# EAGLE board inktime_pcb (EAGLE 9.7.0)
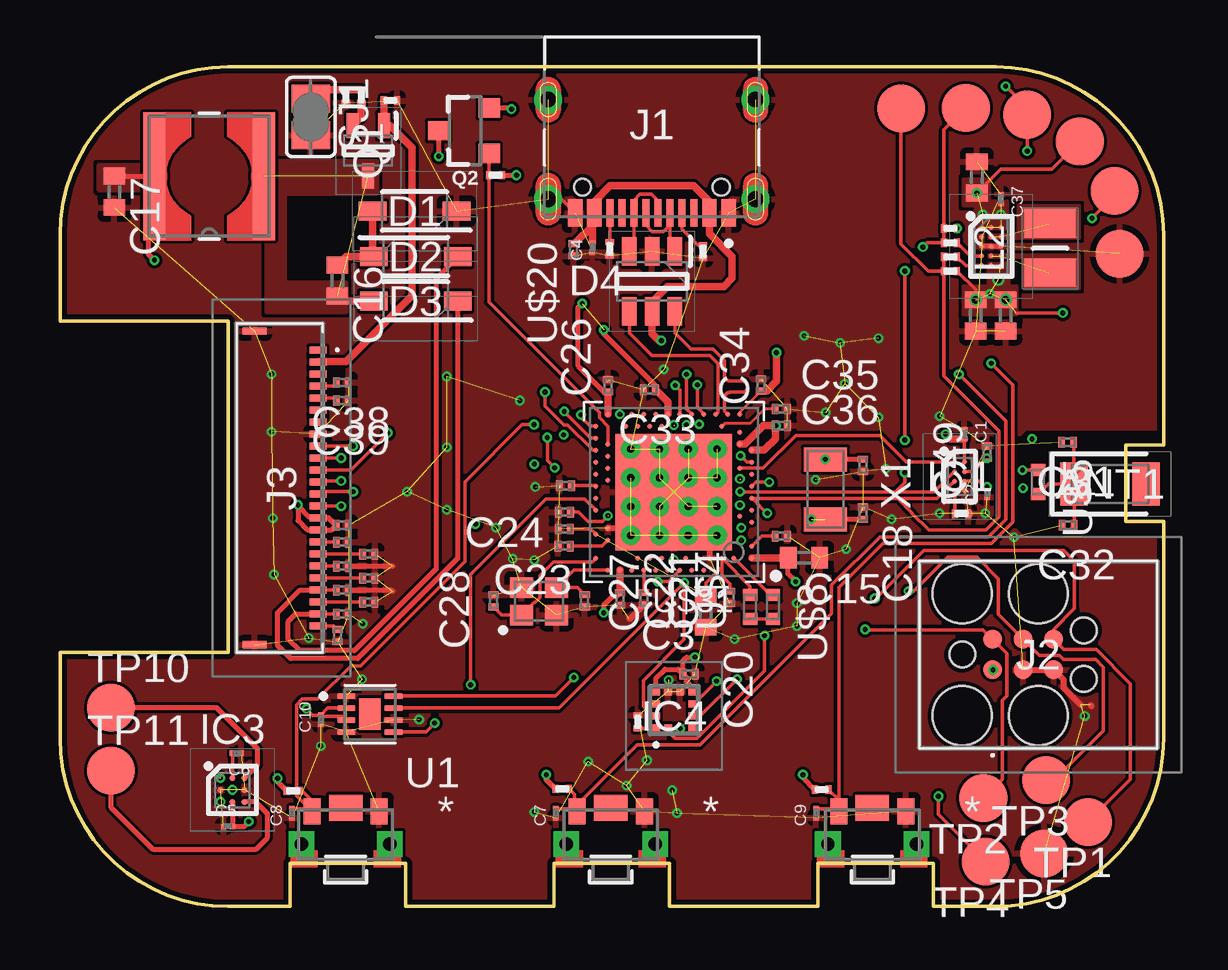
[diagram p0: board, top side]
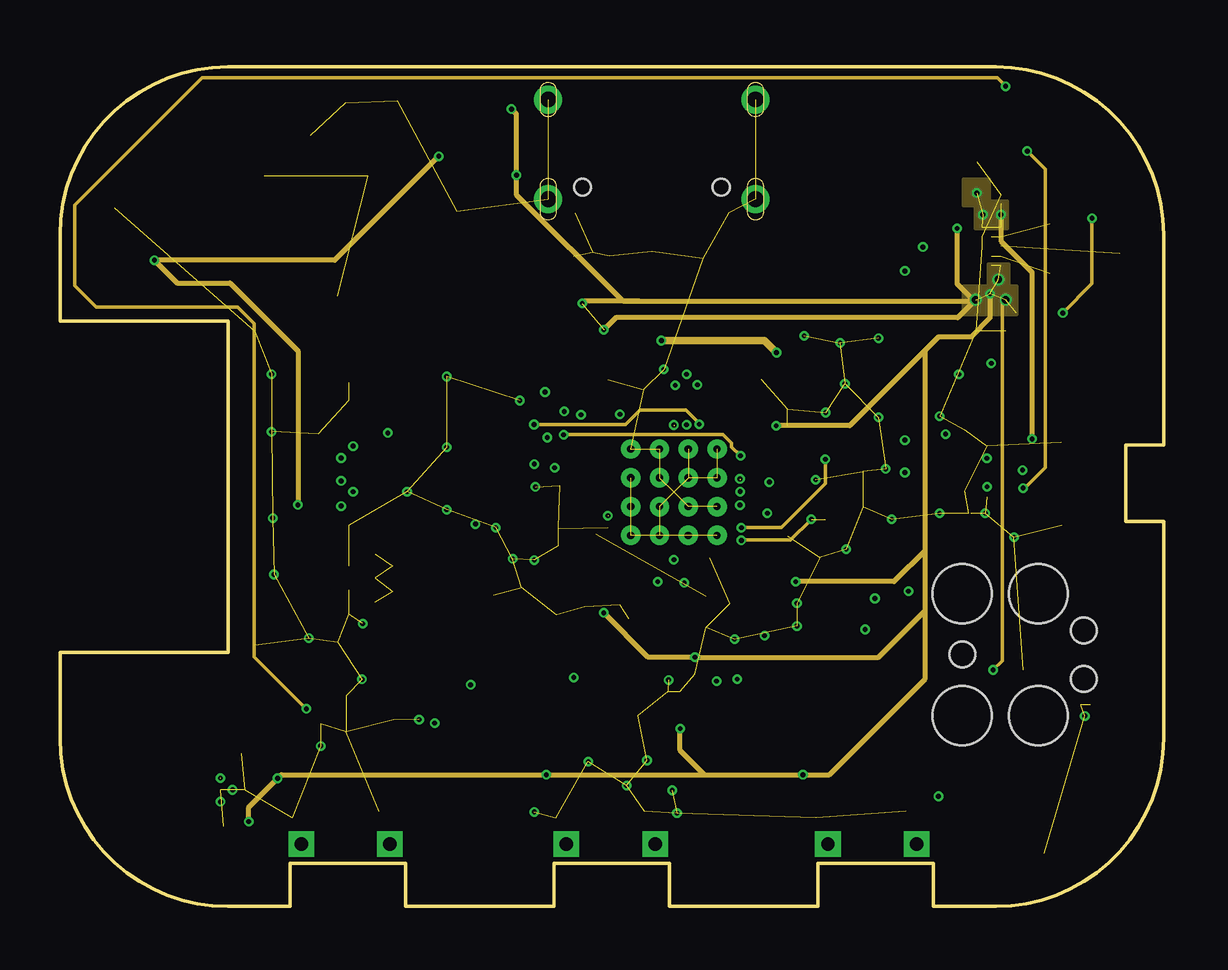
[diagram p1: board, inner layer Route2]
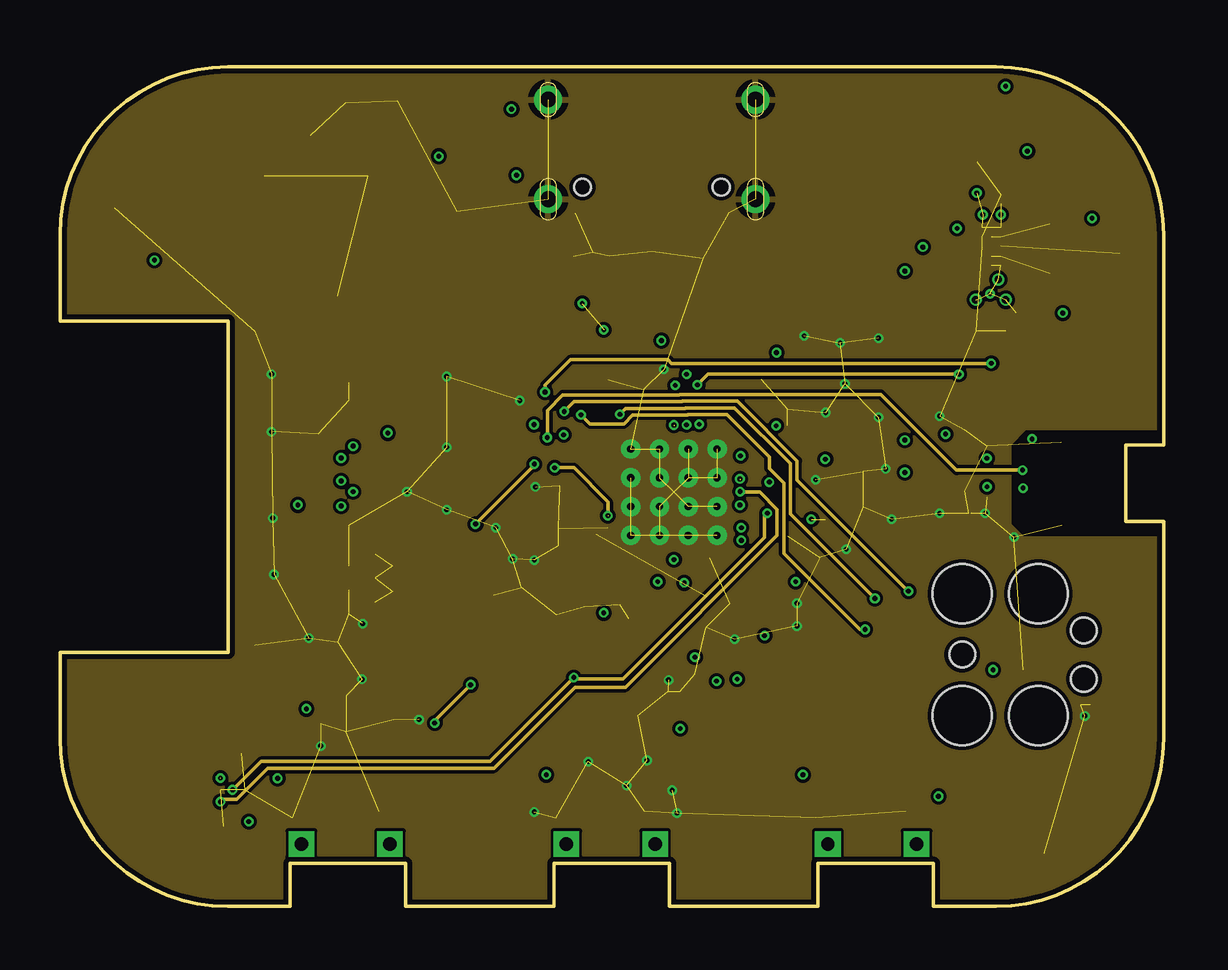
[diagram p2: board, inner layer Route15]
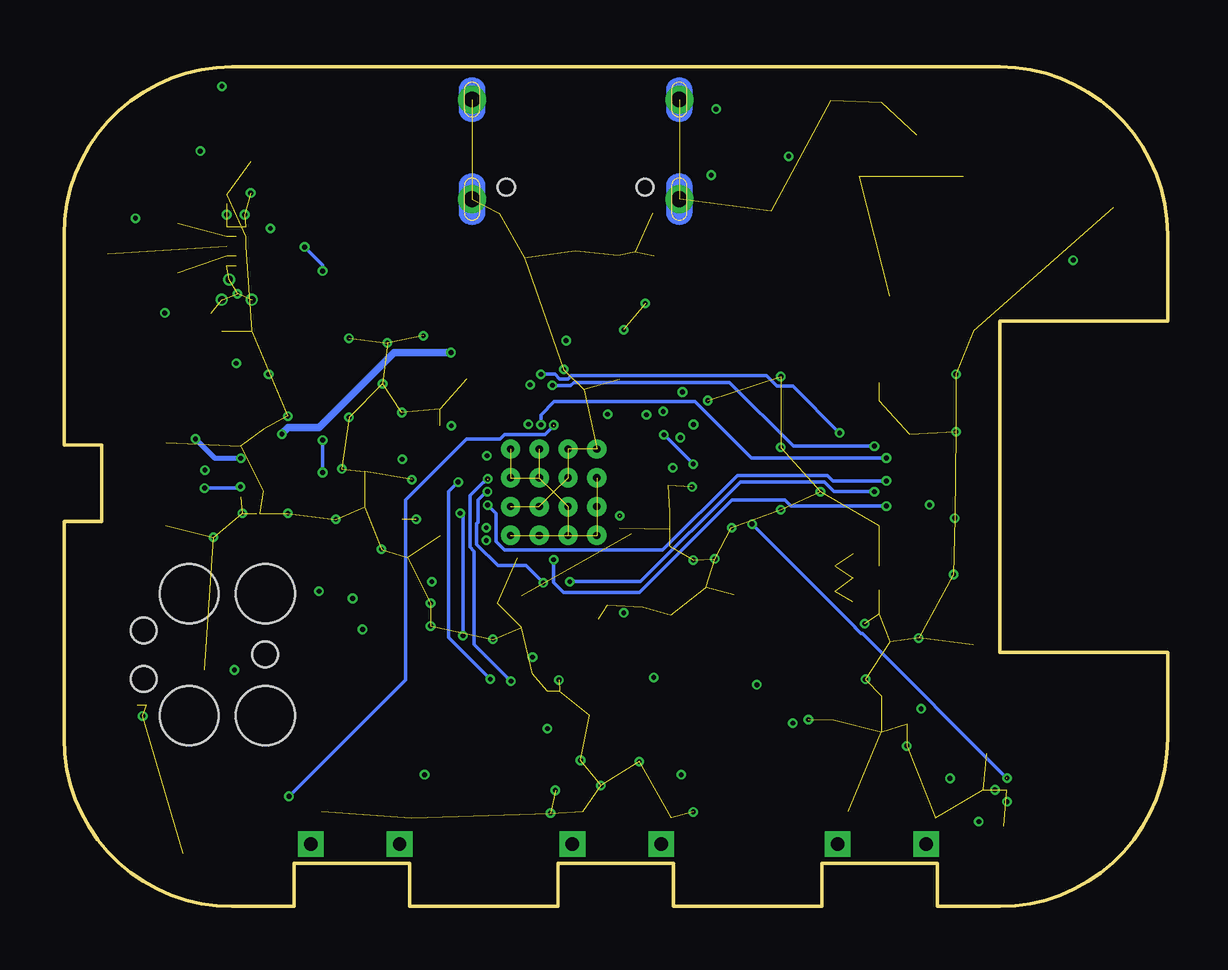
[diagram p3: board, bottom side, seen from below]

Size 46 x 35 mm. Coordinates in mm from the lower left corner, seen from the top.
Outline: 39,0 36.4,0 36.4,1.8 31.6,1.8 31.6,0 25.4,0 25.4,1.8 20.6,1.8 20.6,0 14.4,0 14.4,1.8 9.6,1.8 9.6,0 7,0 arc-90 0,7 0,10.6 7,10.6 7,24.4 0,24.4 0,28 arc-90 7,35 39,35 arc-90 46,28 46,19.24 44.42,19.24 44.42,16.04 46,16.04 46,7 arc-90 39,0
Copper layers (1+2*15+16): Top 0.035mm / dielectric 1.6mm / Route2 0.035mm / dielectric 0.15mm / Route15 0.035mm / dielectric 0.2mm / Bottom 0.035mm
Design rules "jlcpcb-2layers.dru *": minimum track width 5mil, minimum drill 0.2mm, track to track 5mil, track to pad 5mil, pad to pad 5mil, via to via 5mil, smd to smd 5mil, copper to edge 0.2mm, drill to drill 6mil, minimum pad ring 10mil, minimum via ring 0.1mm, stop-mask expansion 4mil, vias tented up to drill 0mil, thermal gap 10mil

## Footprints (pad centres in the part's own frame; a part is rotated, then mirrored left to right if it is on the bottom)
2450AT18B100E_ANTC3216X140N = smd 1.15 x 1.8: 1 -1.5,0; 2 1.5,0
GRM011R60J152KE01L_2_CAPC0201X13N = smd 0.22 x 0.23: 1 -0.185,0; 2 0.185,0
NORDIC_NRF_3_RESC0201_L = smd 0.28 x 0.43: 1 -0.255,0; 2 0.255,0
ESP32_C6_LIBRARY_1_ESP32_WROVER_EAGLE-LTSPICE_C0402 = smd 0.7 x 0.9: 1 -0.65,0; 2 0.65,0
ESP32_C6_LIBRARY_5_SOD3716X135N = smd 1.15 x 0.8: 1 -1.75,0; 2 1.75,0
ESP32_C6_LIBRARY_3_SOT95P280X145-6N = smd 1.2 x 0.6: 1 -1.25,0.95; 2 -1.25,0; 3 -1.25,-0.95; 4 1.25,-0.95; 5 1.25,0; 6 1.25,0.95
BQ25180YBGR_BGA8C40P2X4_100X155X50 = smd 0.2 x 0.2: A1 -0.2,0.6; A2 0.2,0.6; B1 -0.2,0.2; B2 0.2,0.2; C1 -0.2,-0.2; C2 0.2,-0.2; D1 -0.2,-0.6; D2 0.2,-0.6
RT6160AWSC_BGA15C40P3X5_140X230X60 = smd 0.216 x 0.216: A1 -0.4,0.8; A2 0,0.8; A3 0.4,0.8; B1 -0.4,0.4; B2 0,0.4; B3 0.4,0.4; C1 -0.4,0; C2 0,0; C3 0.4,0; D1 -0.4,-0.4; D2 0,-0.4; D3 0.4,-0.4; E1 -0.4,-0.8; E2 0,-0.8; E3 0.4,-0.8
DRV2605YZFR_BGA9C50P3X3_144X144X62 = smd 0.25 x 0.25: A1 -0.5,0.5; A2 0,0.5; A3 0.5,0.5; B1 -0.5,0; B2 0,0; B3 0.5,0; C1 -0.5,-0.5; C2 0,-0.5; C3 0.5,-0.5
BMA423_BMA423 = smd 0.3 x 0.35: 1 -0.75,-0.775; 2 -0.25,-0.775; 3 0.25,-0.775; 4 0.75,-0.775; 7 0.75,0.775; 8 0.25,0.775; 9 -0.25,0.775; 10 -0.75,0.775 | smd 0.35 x 0.3: 5 0.775,-0.25; 6 0.775,0.25; 11 -0.775,0.25; 12 -0.775,-0.25
KH-TYPE-C-16P_KINGHELM_KH-TYPE-C-16P = smd 0.6 x 1.15: A1_B12 -3.2,4.725; A4_B9 -2.4,4.725; A9_B4 2.4,4.725; A12_B1 3.2,4.725 | smd 0.3 x 1.15: A5 -1.25,4.725; A6 -0.25,4.725; A7 0.25,4.725; A8 1.25,4.725; B5 1.75,4.725; B6 0.75,4.725; B7 -0.75,4.725; B8 -1.75,4.725 | drill 0.65 pad 1.05: SH1 -4.32,0; SH2 4.32,0; SH3 -4.32,4.15; SH4 4.32,4.15 | hole 0.7: -2.89,3.65; 2.89,3.65
TC2030-IDC_TC2030IDC = smd 0.783 x 0.783: 1 -0.953,-0.635; 2 -0.953,0.635; 3 0.317,-0.635; 4 0.317,0.635; 5 1.588,-0.635; 6 1.588,0.635 | hole 2.451: -2.223,-2.54; -2.223,2.54; 0.952,-2.54; 0.952,2.54 | hole 1.067: -2.223,0; 2.857,-1.016; 2.857,1.016
503480-2400_5034802400 = smd 0.3 x 0.7: 1 -5.75,1.525; 2 -5.25,1.525; 3 -4.75,1.525; 4 -4.25,1.525; 5 -3.75,1.525; 6 -3.25,1.525; 7 -2.75,1.525; 8 -2.25,1.525; 9 -1.75,1.525; 10 -1.25,1.525; 11 -0.75,1.525; 12 -0.25,1.525; 13 0.25,1.525; 14 0.75,1.525; 15 1.25,1.525; 16 1.75,1.525; 17 2.25,1.525; 18 2.75,1.525; 19 3.25,1.525; 20 3.75,1.525; 21 4.25,1.525; 22 4.75,1.525; 23 5.25,1.525; 24 5.75,1.525 | smd 0.3 x 1: MP1 -6.54,-1.125; MP2 6.54,-1.125
MLP2016SR47MT0S1_INDC2016X100N = smd 1.2 x 2.2: 1 -1.028,0; 2 1.028,0
ESP32_C6_LIBRARY_2_IND_4828-WE-TPC_WRE = smd 0.9 x 5.3: 1 -2.286,0; 2 2.286,0
ESP32_C6_LIBRARY_6_SOT65P210X110-3N = smd 1.05 x 0.5: 1 -1.05,0.65; 2 -1.05,-0.65; 3 1.05,0
ESP32_C6_LIBRARY_4_ESP32_C6_LIBRARY_4_ESP32_C6_LIBRARY_4_ESP32_C6_LIBRARY_4_ESP32_WROVER_SPARKFUN-DISCRETESEMI_SOT23-3 = smd 0.8 x 0.9: 1 -0.95,-1; 2 0.95,-1; 3 0,1.1
ERA-1AEB3401C_0201 = smd 0.35 x 0.25: 1 0,0.275; 2 0,-0.275
ESP32_C6_LIBRARY_7_JUMPER_SJ = smd 1.168 x 1.6: 1 -0.762,0; 2 0.762,0
2025-10-22_07-23-44_LIBRARY_SW_EVP-AKE31A_PAN = smd 0.711 x 1.092: 1 -1.4,-0.972; 2 1.4,-0.972 | drill 0.559 pad 0.914 square: 3 -1.848,0.381; 4 1.848,0.381 | smd 1.397 x 1.092: 5 0,-1.124
HECTOR_WATCH_1_TP20R = smd 2 x 2: TP 0,0
ESP32_C6_LIBRARY_SON50P200X200X80-9N = smd 0.76 x 0.27: 1 -0.985,0.75; 2 -0.985,0.25; 3 -0.985,-0.25; 4 -0.985,-0.75; 5 0.985,-0.75; 6 0.985,-0.25; 7 0.985,0.25; 8 0.985,0.75 | smd 0.9 x 1.3: 9 0,0
NORDIC_NRF_2_RESC0402_L = smd 0.5 x 0.6: 1 -0.5,0; 2 0.5,0
NORDIC_NRF_BT-XTAL_2016_N = smd 0.95 x 0.85: 1 -0.725,-0.575; 2 0.725,-0.575; 3 0.725,0.575; 4 -0.725,0.575
NORDIC_NRF_4_AQFN50P700X700X85_HS-74N = smd 4.85 x 4.85: P$74 0,0 | drill 0.3 pad 0.6: P$75 -1.8,1.8; P$76 -0.6,1.8; P$77 0.6,1.8; P$78 1.8,1.8; P$79 -1.8,0.6; P$80 -0.6,0.6; P$81 0.6,0.6; P$82 1.8,0.6; P$83 -1.8,-0.6; P$84 -0.6,-0.6; P$85 0.6,-0.6; P$86 1.8,-0.6; P$87 -1.8,-1.8; P$88 -0.6,-1.8; P$89 0.6,-1.8; P$90 1.8,-1.8 | smd 0.2 x 0.2: P$A8 -1.25,3.25; P$A10 -0.75,3.25; P$A12 -0.25,3.25; P$A14 0.25,3.25; P$A16 0.75,3.25; P$A18 1.25,3.25; P$A20 1.75,3.25; P$A22 2.25,3.25; P$A23 2.75,3.25; P$AA24 3.25,-2.25; P$AB2 -2.75,-2.5; P$AC5 -2,-2.75; P$AC9 -1,-2.75; P$AC11 -0.5,-2.75; P$AC13 0,-2.75; P$AC15 0.5,-2.75; P$AC17 1,-2.75; P$AC19 1.5,-2.75; P$AC21 2,-2.75; P$AC24 3.25,-2.75; P$AD2 -2.75,-3.25; P$AD4 -2.25,-3.25; P$AD6 -1.75,-3.25; P$AD8 -1.25,-3.25; P$AD10 -0.75,-3.25; P$AD12 -0.25,-3.25; P$AD14 0.25,-3.25; P$AD16 0.75,-3.25; P$AD18 1.25,-3.25; P$AD20 1.75,-3.25; P$AD22 2.25,-3.25; P$AD23 2.75,-3.25; P$B1 -3.25,2.75; P$B3 -2.5,2.75; P$B5 -2,2.75; P$B7 -1.5,2.75; P$B9 -1,2.75; P$B11 -0.5,2.75; P$B13 0,2.75; P$B15 0.5,2.75; P$B17 1,2.75; P$B19 1.5,2.75; P$B24 3.25,2.75; P$C1 -3.25,2.25; P$D2 -2.75,2; P$D23 2.75,2; P$E24 3.25,1.75; P$F2 -2.75,1.5; P$F23 2.75,1.5; P$G1 -3.25,1.25; P$H2 -2.75,1; P$H23 2.75,1; P$J1 -3.25,0.75; P$J24 3.25,0.75; P$K2 -2.75,0.5; P$L1 -3.25,0.25; P$L24 3.25,0.25; P$M2 -2.75,0; P$N1 -3.25,-0.25; P$N24 3.25,-0.25; P$P2 -2.75,-0.5; P$P23 2.75,-0.5; P$R1 -3.25,-0.75; P$R24 3.25,-0.75; P$T2 -2.75,-1; P$T23 2.75,-1; P$U1 -3.25,-1.25; P$U24 3.25,-1.25; P$V23 2.75,-1.5; P$W1 -3.25,-1.75; P$W24 3.25,-1.75; P$Y2 -2.75,-2; P$Y23 2.75,-2
NORDIC_NRF_1_XTAL_3215_N = smd 1 x 1.8: 1 -1.25,0; 2 1.25,0

## Placement (x,y rotation side)
ANT1  2450AT18B100E_2450AT18B100E  [2450AT18B100E_ANTC3216X140N]  43.77,17.61 0 top
C1  1u  [GRM011R60J152KE01L_2_CAPC0201X13N]  37.7,19.7 270 top
C2  1u  [GRM011R60J152KE01L_2_CAPC0201X13N]  38.65,17.24 90 top
C3  100n  [NORDIC_NRF_3_RESC0201_L]  26.22,9.69 0 top
C4  0.1u  [GRM011R60J152KE01L_2_CAPC0201X13N]  22.2,27.45 90 top
C5  0.1u  [GRM011R60J152KE01L_2_CAPC0201X13N]  7.01,3.34 0 top
C6  1u  [GRM011R60J152KE01L_2_CAPC0201X13N]  7.37,6.39 180 top
C7  0.1u  [GRM011R60J152KE01L_2_CAPC0201X13N]  20.67,3.89 90 top
C8  0.1u  [GRM011R60J152KE01L_2_CAPC0201X13N]  9.67,3.89 90 top
C9  0.1u  [GRM011R60J152KE01L_2_CAPC0201X13N]  31.52,3.89 90 top
C10  1u  [GRM011R60J152KE01L_2_CAPC0201X13N]  10.87,7.79 90 top
C11  10u  [ESP32_C6_LIBRARY_1_ESP32_WROVER_EAGLE-LTSPICE_C0402]  38.22,30.39 90 top
C12  22u  [ESP32_C6_LIBRARY_1_ESP32_WROVER_EAGLE-LTSPICE_C0402]  38.17,24.63 270 top
C13  22u  [ESP32_C6_LIBRARY_1_ESP32_WROVER_EAGLE-LTSPICE_C0402]  39.42,24.63 270 top
C14  1.0u  [ESP32_C6_LIBRARY_1_ESP32_WROVER_EAGLE-LTSPICE_C0402]  26.92,12.29 270 top
C15  4.7u  [ESP32_C6_LIBRARY_1_ESP32_WROVER_EAGLE-LTSPICE_C0402]  31.02,14.54 0 top
C16  4.7u/25V  [ESP32_C6_LIBRARY_1_ESP32_WROVER_EAGLE-LTSPICE_C0402]  11.57,26.09 270 top
C17  10u  [ESP32_C6_LIBRARY_1_ESP32_WROVER_EAGLE-LTSPICE_C0402]  2.27,29.79 270 top
C18  4.7u  [NORDIC_NRF_3_RESC0201_L]  33.47,16.4 270 top
C19  4.7u  [NORDIC_NRF_3_RESC0201_L]  33.47,18.39 90 top
C20  47n  [NORDIC_NRF_3_RESC0201_L]  27.92,12.89 270 top
C21  N.C  [NORDIC_NRF_3_RESC0201_L]  24.35,12.83 270 top
C22  100n  [NORDIC_NRF_3_RESC0201_L]  23.34,12.82 270 top
C23  100p  [NORDIC_NRF_3_RESC0201_L]  21.02,15.02 180 top
C24  N.C  [NORDIC_NRF_3_RESC0201_L]  21.02,15.74 180 top
C25  820p  [NORDIC_NRF_3_RESC0201_L]  21.07,17.54 180 top
C26  100n  [NORDIC_NRF_3_RESC0201_L]  22.84,21.71 90 top
C27  12p  [NORDIC_NRF_3_RESC0201_L]  21.87,12.74 270 top
C28  12p  [NORDIC_NRF_3_RESC0201_L]  18.07,12.74 90 top
C29  N.C  [NORDIC_NRF_3_RESC0201_L]  21.03,16.44 180 top
C30  100n  [NORDIC_NRF_3_RESC0201_L]  30.07,15.44 0 top
C31  N.C  [NORDIC_NRF_3_RESC0201_L]  42,19.35 180 top
C32  N.C  [NORDIC_NRF_3_RESC0201_L]  42.02,15.89 180 top
C33  100n  [NORDIC_NRF_3_RESC0201_L]  24.57,21.54 180 top
C34  4.7u  [NORDIC_NRF_3_RESC0201_L]  29.22,21.74 90 top
C35  4.7u  [NORDIC_NRF_3_RESC0201_L]  30.07,20.74 0 top
C36  4.7u  [NORDIC_NRF_3_RESC0201_L]  30.07,20.04 0 top
C37  0.1u  [GRM011R60J152KE01L_2_CAPC0201X13N]  39.22,29.49 270 top
C38  1u/50V  [NORDIC_NRF_3_RESC0201_L]  11.77,21.84 180 top
C39  1u/50V  [NORDIC_NRF_3_RESC0201_L]  11.77,21.09 180 top
C40  1u/50V  [NORDIC_NRF_3_RESC0201_L]  11.77,15.19 180 top
C41  1u/50V  [NORDIC_NRF_3_RESC0201_L]  12.87,14.69 180 top
C42  1u/50V  [NORDIC_NRF_3_RESC0201_L]  11.77,14.19 180 top
C43  1u/50V  [NORDIC_NRF_3_RESC0201_L]  12.87,13.69 180 top
C44  1u/50V  [NORDIC_NRF_3_RESC0201_L]  11.77,13.19 180 top
C45  1u/50V  [NORDIC_NRF_3_RESC0201_L]  12.87,12.69 180 top
C46  1u/50V  [NORDIC_NRF_3_RESC0201_L]  11.77,12.19 180 top
C47  1u/50V  [NORDIC_NRF_3_RESC0201_L]  11.57,11.29 90 top
C48  0.1u/50V  [NORDIC_NRF_3_RESC0201_L]  11.77,15.89 180 top
C49  47n  [NORDIC_NRF_3_RESC0201_L]  38.64,18.94 90 top
D1  ESP32_C6_LIBRARY_5_MBR0530  [ESP32_C6_LIBRARY_5_SOD3716X135N]  14.78,28.99 180 top
D2  ESP32_C6_LIBRARY_5_MBR0530  [ESP32_C6_LIBRARY_5_SOD3716X135N]  14.83,27.09 0 top
D3  ESP32_C6_LIBRARY_5_MBR0530  [ESP32_C6_LIBRARY_5_SOD3716X135N]  14.83,25.24 180 top
D4  ESP32_C6_LIBRARY_3_USBLC6-2SC6Y  [ESP32_C6_LIBRARY_3_SOT95P280X145-6N]  24.68,26.06 270 top
IC1  BQ25180YBGR_BQ25180YBGR  [BQ25180YBGR_BGA8C40P2X4_100X155X50]  37.5,17.93 0 top
IC2  RT6160AWSC_RT6160AWSC  [RT6160AWSC_BGA15C40P3X5_140X230X60]  38.82,27.52 0 top
IC3  DRV2605YZFR_DRV2605YZFR  [DRV2605YZFR_BGA9C50P3X3_144X144X62]  7.19,4.86 0 top
IC4  BMA423_BMA423  [BMA423_BMA423]  25.6,8.19 0 top
J1  KH-TYPE-C-16P_KH-TYPE-C-16P  [KH-TYPE-C-16P_KINGHELM_KH-TYPE-C-16P]  24.67,33.64 180 top
J2  TC2030-IDC_TC2030-IDC  [TC2030-IDC_TC2030IDC]  39.83,10.5 0 top
J3  503480-2400_503480-2400  [503480-2400_5034802400]  9.23,17.45 270 top
L2  MLP2016SR47MT0S1_FTC252012SR47MBCA  [MLP2016SR47MT0S1_INDC2016X100N]  41.27,27.44 270 top
L4  68u  [ESP32_C6_LIBRARY_2_IND_4828-WE-TPC_WRE]  6.22,30.44 180 top
Q1  ESP32_C6_LIBRARY_6_SI1308EDL-T1-GE3  [ESP32_C6_LIBRARY_6_SOT65P210X110-3N]  12.85,31.5 270 top
Q2  20V/4.2A/52mΩ/1.4W  [ESP32_C6_LIBRARY_4_ESP32_C6_LIBRARY_4_ESP32_C6_LIBRARY_4_ESP32_C6_LIBRARY_4_ESP32_WROVER_SPARKFUN-DISCRETESEMI_SOT23-3]  16.89,32.34 90 top
R1  10K  [ERA-1AEB3401C_0201]  13.77,33.6 90 top
R2  0.47  [ERA-1AEB3401C_0201]  12.56,33.78 180 top
R3  2.2  [ERA-1AEB3401C_0201]  18.15,30.49 270 top
R4  2.2  [ERA-1AEB3401C_0201]  11.91,33.78 0 top
R5  10K  [ERA-1AEB3401C_0201]  37.58,16.38 270 top
R6  0  [ERA-1AEB3401C_0201]  37.12,27.67 270 top
R7  0  [ERA-1AEB3401C_0201]  37.12,27.08 270 top
R8  5K1  [ERA-1AEB3401C_0201]  26.8,27.3 180 top
R9  5K1  [ERA-1AEB3401C_0201]  22.92,27.41 0 top
R10  3K3  [ERA-1AEB3401C_0201]  37.12,28.27 270 top
R11  3K3  [ERA-1AEB3401C_0201]  37.12,26.48 270 top
R12  10K  [ERA-1AEB3401C_0201]  20.94,4.9 270 top
R13  10K  [ERA-1AEB3401C_0201]  9.72,4.82 270 top
R14  10K  [ERA-1AEB3401C_0201]  31.75,4.87 270 top
R15  0  [ERA-1AEB3401C_0201]  24.09,7.7 180 top
SJ1  [ESP32_C6_LIBRARY_7_JUMPER_SJ]  10.45,32.91 270 top
SW1  2025-10-22_07-23-44_LIBRARY_EVP-AKE31ASW_EVP-AKE31A_PAN  [2025-10-22_07-23-44_LIBRARY_SW_EVP-AKE31A_PAN]  22.96,2.99 180 top
SW2  2025-10-22_07-23-44_LIBRARY_EVP-AKE31ASW_EVP-AKE31A_PAN  [2025-10-22_07-23-44_LIBRARY_SW_EVP-AKE31A_PAN]  11.91,2.99 180 top
SW3  2025-10-22_07-23-44_LIBRARY_EVP-AKE31ASW_EVP-AKE31A_PAN  [2025-10-22_07-23-44_LIBRARY_SW_EVP-AKE31A_PAN]  33.86,2.99 180 top
TP1  HECTOR_WATCH_1_TPTP20R  [HECTOR_WATCH_1_TP20R]  42.85,3.52 180 top
TP2  HECTOR_WATCH_1_TPTP20R  [HECTOR_WATCH_1_TP20R]  38.49,4.51 180 top
TP3  HECTOR_WATCH_1_TPTP20R  [HECTOR_WATCH_1_TP20R]  41.11,5.26 180 top
TP4  HECTOR_WATCH_1_TPTP20R  [HECTOR_WATCH_1_TP20R]  38.59,1.87 180 top
TP5  HECTOR_WATCH_1_TPTP20R  [HECTOR_WATCH_1_TP20R]  41.02,2.21 180 top
TP6  HECTOR_WATCH_1_TPTP20R  [HECTOR_WATCH_1_TP20R]  37.76,33.29 0 top
TP7  HECTOR_WATCH_1_TPTP20R  [HECTOR_WATCH_1_TP20R]  43.96,29.83 0 top
TP8  HECTOR_WATCH_1_TPTP20R  [HECTOR_WATCH_1_TP20R]  35.06,33.26 0 top
TP9  HECTOR_WATCH_1_TPTP20R  [HECTOR_WATCH_1_TP20R]  42.51,31.9 0 top
TP10  HECTOR_WATCH_1_TPTP20R  [HECTOR_WATCH_1_TP20R]  2.13,8.29 0 top
TP11  HECTOR_WATCH_1_TPTP20R  [HECTOR_WATCH_1_TP20R]  2.12,5.67 0 top
TP12  HECTOR_WATCH_1_TPTP20R  [HECTOR_WATCH_1_TP20R]  40.31,33.01 0 top
TP13  HECTOR_WATCH_1_TPTP20R  [HECTOR_WATCH_1_TP20R]  44.17,27.21 0 top
U1  ESP32_C6_LIBRARY_MAX17048G+T10  [ESP32_C6_LIBRARY_SON50P200X200X80-9N]  12.92,8.02 0 top
U$4  15n  [NORDIC_NRF_2_RESC0402_L]  28.77,12.49 90 top
U$5  [NORDIC_NRF_2_RESC0402_L]  40.77,17.69 270 top
U$8  10u  [NORDIC_NRF_2_RESC0402_L]  29.72,12.49 270 top
U$20  4.7u  [NORDIC_NRF_3_RESC0201_L]  21.41,27.38 270 top
U$22  32MHz  [NORDIC_NRF_BT-XTAL_2016_N]  19.97,12.72 0 top
U$31  NORDIC_NRF_4_NRF52840_QF  [NORDIC_NRF_4_AQFN50P700X700X85_HS-74N]  25.59,17.27 180 top
X1  32.768kHz  [NORDIC_NRF_1_XTAL_3215_N]  31.9,17.39 270 top

## Library data of the parts
ANT1 = Inktime Library; ARROW_PART_NUMBER: 2450AT18B100E; ARROW_PRICE-STOCK: https://www.arrow.com/en/products/2450at18b100e/johanson-dielectrics?utm_currency=USD&region=nac; DESCRIPTION: Antennas 2.45GHz ANTENNA; HEIGHT: 1.4mm; MANUFACTURER_NAME: JOHANSON TECHNOLOGY; MANUFACTURER_PART_NUMBER: 2450AT18B100E; MOUSER_PART_NUMBER: 609-2450AT18B100E; MOUSER_PRICE-STOCK: https://www.mouser.co.uk/ProductDetail/Johanson-Technology/2450AT18B100E?qs=yCnrNFeXz%252Bh5MFsFIXGZGA%3D%3D
C1 C2 C4-C10 C37 = Inktime Library; AVAILABILITY: In Stock; CHECK_PRICES: https://www.snapeda.com/parts/GRM011R60J152KE01L/Murata/view-part/?ref=eda; DESCRIPTION: SMD Capacitor X5R(EIA) with Capacitance: 1500pF Tol. 10%. Rated Voltage: 6.3Vdc; MF: Murata; MP: GRM011R60J152KE01L; PACKAGE: 0201 Murata; PRICE: None; SNAPEDA_LINK: https://www.snapeda.com/parts/GRM011R60J152KE01L/Murata/view-part/?ref=snap
C3 C18-C36 C38-C49 R1-R15 SJ1 TP1-TP13 U$4 U$5 U$8 U$20 U$22 U$31 X1 = Inktime Library
C11-C17 = Inktime Library; SPICEMODEL: NONE; SPICEPREFIX: C
D1-D3 = Inktime Library; AVAILABILITY: In Stock; CHECK_PRICES: https://www.snapeda.com/parts/MBR0530/Onsemi/view-part/?ref=eda; DESCRIPTION: Diode Schottky 30 V 500mA Surface Mount SOD-123; MF: ON Semiconductor; MP: MBR0530; PACKAGE: SOD-123-2 ON Semiconductor; PRICE: None; PURCHASE-URL: https://www.snapeda.com/api/url_track_click_mouser/?unipart_id=179458&manufacturer=ON Semiconductor&part_name=MBR0530&search_term=None; SNAPEDA_LINK: https://www.snapeda.com/parts/MBR0530/Onsemi/view-part/?ref=snap
D4 = Inktime Library; AVAILABILITY: In Stock; CHECK_PRICES: https://www.snapeda.com/parts/USBLC6-2SC6Y/STMicroelectronics/view-part/?ref=eda; DESCRIPTION: 17V Clamp 5A (8/20µs) Ipp Tvs Diode Surface Mount SOT-23-6; MF: STMicroelectronics; MP: USBLC6-2SC6Y; PACKAGE: SOT-23-6 STMicroelectronics; PRICE: None; SNAPEDA_LINK: https://www.snapeda.com/parts/USBLC6-2SC6Y/STMicroelectronics/view-part/?ref=snap
IC1 = Inktime Library; ARROW_PART_NUMBER: BQ25180YBGR; ARROW_PRICE-STOCK: https://www.arrow.com/en/products/bq25180ybgr/texas-instruments?utm_currency=USD&region=nac; DESCRIPTION: Charger IC Lithium Ion/Polymer, Lithium Iron Phosphate 8-DSBGA (1.6x1.1); HEIGHT: 0.5mm; MANUFACTURER_NAME: Texas Instruments; MANUFACTURER_PART_NUMBER: BQ25180YBGR; MOUSER_PART_NUMBER: 595-BQ25180YBGR; MOUSER_PRICE-STOCK: https://www.mouser.co.uk/ProductDetail/Texas-Instruments/BQ25180YBGR?qs=doiCPypUmgEWjAK%252BJAX6Tw%3D%3D
IC2 = Inktime Library; DESCRIPTION: Buck-Boost Regulator Positive Output Step-Up/Step-Down I2C DC-DC Controller IC 15-WL-CSP (BSC) (1.4x2.3); HEIGHT: 0.6mm; MANUFACTURER_NAME: RICHTEK; MANUFACTURER_PART_NUMBER: RT6160AWSC; MOUSER_PART_NUMBER: 835-RT6160AWSC; MOUSER_PRICE-STOCK: https://www.mouser.co.uk/ProductDetail/Richtek/RT6160AWSC?qs=amGC7iS6iy%2FLd9PSoixZXQ%3D%3D
IC3 = Inktime Library; ARROW_PART_NUMBER: DRV2605YZFR; ARROW_PRICE-STOCK: https://www.arrow.com/en/products/drv2605yzfr/texas-instruments?region=nac; DESCRIPTION: Haptic Driver for ERM/LRA with Built-In Library and Smart Loop Architecture; HEIGHT: 0.625mm; MANUFACTURER_NAME: Texas Instruments; MANUFACTURER_PART_NUMBER: DRV2605YZFR
IC4 = Inktime Library; ARROW_PART_NUMBER: BMA423; ARROW_PRICE-STOCK: https://www.arrow.com/en/products/bma423/bosch; DESCRIPTION: Accelerometers Triaxial low-g 12bit Acceleration Sensor; HEIGHT: 1mm; MANUFACTURER_NAME: BOSCH; MANUFACTURER_PART_NUMBER: BMA423; MOUSER_PART_NUMBER: 262-BMA423; MOUSER_PRICE-STOCK: https://www.mouser.co.uk/ProductDetail/Bosch-Sensortec/BMA423?qs=HXFqYaX1Q2xC%252BSgeGoX3mg%3D%3D
J1 = Inktime Library; AVAILABILITY: Not in stock; CHECK_PRICES: https://www.snapeda.com/parts/KH-TYPE-C-16P/Kinghelm/view-part/?ref=eda; MF: kinghelm; MP: KH-TYPE-C-16P; PACKAGE: None; PRICE: None; SNAPEDA_LINK: https://www.snapeda.com/parts/KH-TYPE-C-16P/Kinghelm/view-part/?ref=snap
J2 = Inktime Library; DESCRIPTION: CABLE ADAPTER 6 POS; HEIGHT: 19mm; MANUFACTURER_NAME: Tag Connect; MANUFACTURER_PART_NUMBER: TC2030-IDC
J3 = Inktime Library; DESCRIPTION: FFC & FPC Connectors 0.5mm FPC RA SMT Dual Contact 24Ckt; HEIGHT: 1.87mm; MANUFACTURER_NAME: Molex; MANUFACTURER_PART_NUMBER: 503480-2400; MOUSER_PART_NUMBER: 538-503480-2400; MOUSER_PRICE-STOCK: https://www.mouser.co.uk/ProductDetail/Molex/503480-2400?qs=OAhjpuo3Vu7efIoxFh9AOw%3D%3D
L2 = Inktime Library; DESCRIPTION: SMD / SMT Inductors (Coils), L=0.47?H, L x W x T :; HEIGHT: 1mm; JLCPCB: https://jlcpcb.com/partdetail/6763488-FTC252012SR47MBCA/C5832368; MANUFACTURER_NAME: TDK; MANUFACTURER_PART_NUMBER: FTC252012SR47MBCA
L4 = Inktime Library; COPYRIGHT: Copyright (C) 2024 Ultra Librarian. All rights reserved.; MANUFACTURER_PART_NUMBER: 744043680; MFR_NAME: Wurth Electronics
Q1 = Inktime Library; AVAILABILITY: In Stock; CHECK_PRICES: https://www.snapeda.com/parts/SI1308EDL-T1-GE3/Vishay+Siliconix/view-part/?ref=eda; DESCRIPTION: Si1308EDL-T1-GE3 N-channel MOSFET Transistor, 1.5 A, 30 V, 3-Pin SC-70 | Siliconix / Vishay SI1308EDL-T1-GE3; MF: Vishay Siliconix; MP: SI1308EDL-T1-GE3; PACKAGE: SOT-323 Vishay Semiconductor; PRICE: None; PURCHASE-URL: https://www.snapeda.com/api/url_track_click_mouser/?unipart_id=274603&manufacturer=Vishay Siliconix&part_name=SI1308EDL-T1-GE3&search_term=None; SNAPEDA_LINK: https://www.snapeda.com/parts/SI1308EDL-T1-GE3/Vishay+Siliconix/view-part/?ref=snap
Q2 = Inktime Library; PROD_ID: TRAN-14388
SW1-SW3 = Inktime Library; COPYRIGHT: Copyright (C) 2025 Ultra Librarian. All rights reserved.; DIGI-KEY_PART_NUMBER_1: P123437TR-ND; DIGI-KEY_PART_NUMBER_2: P123437CT-ND; DIGI-KEY_PART_NUMBER_3: P123437DKR-ND; MANUFACTURER_NAME: Panasonic; MANUFACTURER_PART_NUMBER: EVP-AKE31A
U1 = Inktime Library; AVAILABILITY: In Stock; CHECK_PRICES: https://www.snapeda.com/parts/MAX17048G+T10/Analog+Devices/view-part/?ref=eda; DESCRIPTION: 3µA 1-Cell/2-Cell Fuel Gauge with ModelGauge; MF: Analog Devices; MP: MAX17048G+T10; PACKAGE: TDFN-8 Maxim; PRICE: None; PURCHASE-URL: https://www.snapeda.com/api/url_track_click_mouser/?unipart_id=329239&manufacturer=Analog Devices&part_name=MAX17048G+T10&search_term=None; SNAPEDA_LINK: https://www.snapeda.com/parts/MAX17048G+T10/Analog+Devices/view-part/?ref=snap

## Nets
3V1: C35.1 U$31.P$AC5
3V3: C3.1 C5.2 C12.1 C13.1 C15.1 C22.1 C26.1 C33.1 C36.1 IC2.E2 IC2.E3 IC3.C2 IC4.3 IC4.7 IC4.10 J2.1 Q2.2 R3.1 R10.1 R11.1 R12.2 R13.2 R14.2 TP7.TP U$31.P$A22 U$31.P$AD14 U$31.P$AD23 U$31.P$B1 U$31.P$W1 U$31.P$Y2
ALERT: U1.5 U$31.P$J24
ANT: C29.1 U$5.1 U$31.P$H23
D_N: D4.6 U$31.P$AD4
D_P: D4.4 U$31.P$AD6
DEC1: C30.1 U$31.P$C1
DEC3: C23.1 U$31.P$D23
DEC4_6: C14.1 C20.1 C24.1 U$4.2 U$31.P$B5 U$31.P$E24
DN: D4.1 J1.A7 J1.B7
DP: D4.3 J1.A6 J1.B6
EP: U1.9
EPD_3V3: C17.1 C48.2 J3.15 J3.16 L4.2 Q2.3
EPD_BUSY: J3.9 U$31.P$AD12
EPD_CS: J3.12 U$31.P$K2
EPD_DC: J3.11 U$31.P$AD10
EPD_RST: J3.10 U$31.P$AC11
GDR: J3.2 Q1.1 R1.1
GND: C1.1 C2.1 C3.2 C4.1 C5.1 C6.1 C7.1 C8.1 C9.1 C10.1 C11.2 C12.2 C13.2 C14.2 C15.2 C17.2 C18.1 C19.1 C20.2 C21.2 C22.2 C23.2 C24.2 C25.2 C26.2 C27.2 C28.2 C29.2 C30.2 C31.2 C32.2 C33.2 C34.2 C35.2 C36.2 C37.1 C38.1 C39.1 C40.1 C41.1 C42.1 C43.1 C44.1 C45.1 C46.1 C47.1 C48.1 C49.2 D1.1 D4.2 IC1.D2 IC2.B1 IC2.C1 IC2.C2 IC2.C3 IC3.B1 IC3.B3 IC4.8 IC4.9 J1.A1_B12 J1.A12_B1 J1.SH1 J1.SH2 J1.SH3 J1.SH4 J2.3 J2.5 J3.8 J3.MP1 J3.MP2 R1.2 R4.2 R5.1 R8.1 R9.2 R15.2 SJ1.2 SW1.1 SW2.1 SW3.1 TP5.TP TP13.TP U1.1 U1.4 U1.6 U$20.2 U$22.2 U$22.4 U$31.P$74 U$31.P$75 U$31.P$76 U$31.P$77 U$31.P$78 U$31.P$79 U$31.P$80 U$31.P$81 U$31.P$82 U$31.P$83 U$31.P$84 U$31.P$85 U$31.P$86 U$31.P$87 U$31.P$88 U$31.P$89 U$31.P$90 U$31.P$B7 U$31.P$F23
HAPTIC_EN: IC3.A1 U$31.P$U1
IMU_INT1: IC4.5 U$31.P$N1
IMU_INT2: IC4.6 U$31.P$P2
LX1: IC2.B2 IC2.B3 L2.1
LX2: IC2.D2 IC2.D3 L2.2
MOSI: J3.14 U$31.P$B13
N$1: C18.2 U$31.P$D2 X1.2
N$2: C19.2 U$31.P$F2 X1.1
N$3: U$4.1 U$8.2
N$5: U$8.1 U$31.P$B3
N$8: C25.1 U$31.P$N24
N$9: IC1.D1 R5.2
N$10: ANT1.1 C31.1 C32.1 U$5.2
N$11: C21.1 U$31.P$A18
N$12: IC2.D1 R6.1
N$13: IC2.E1 R7.1
N$14: C6.2 IC3.A2
N$15: J1.A5 R8.2
N$16: J1.B5 R9.1
N$18: Q1.2 R2.1
N$19: IC4.1 R15.1
N$20: C38.2 J3.4
N$21: C39.2 J3.5
N$22: R2.2 R4.1 SJ1.1
N$23: C16.1 D1.2 D2.1
N$25: C16.2 D3.2 L4.1 Q1.3
N$31: C40.2 J3.17
N$32: C41.2 J3.18
N$33: C42.2 J3.19
N$34: C43.2 J3.20
N$36: C45.2 J3.22
N$38: C47.2 J3.24
OUT+: IC3.A3 TP10.TP
OUT-: IC3.C3 TP11.TP
P0.04: U$31.P$J1
P0.09: U$31.P$L24
P0.13: C7.2 R12.1 SW1.2 U$31.P$AD8
P0.14: C8.2 R13.1 SW2.2 U$31.P$AC9
P0.19: U$31.P$AC15
P0.20: U$31.P$AD16
P0.21: U$31.P$AC17
P0.22: U$31.P$AD18
P0.23: U$31.P$AC19
P0.24: U$31.P$AD20
P0.25: U$31.P$AC21
P0.26: U$31.P$G1
P0.27: U$31.P$H2
P0.28: U$31.P$B11
P0.29: U$31.P$A10
P0.30: U$31.P$B9
P0.31: U$31.P$A8
P1.01: Q2.1 R3.2 U$31.P$Y23
P1.02: C9.2 R14.1 SW3.2 U$31.P$W24
P1.03: U$31.P$V23
P1.04: U$31.P$U24
P1.05: U$31.P$T23
P1.06: U$31.P$R24
P1.07: U$31.P$P23
P1.09: U$31.P$R1
P1.10: U$31.P$A20
P1.11: U$31.P$B19
P1.12: U$31.P$B17
P1.13: U$31.P$A16
P1.14: U$31.P$B15
P1.15: U$31.P$A14
PMIC_INT: IC1.A1 U$31.P$T2
PREVGH: C44.2 D3.1 J3.21
PREVGL: C46.2 D2.2 J3.23
RESE: J3.3
RESET: TP4.TP U$31.P$AC13
SCK: J3.13 U$31.P$A12
SCL: IC1.B1 IC3.C1 IC4.12 R6.2 R10.2 TP6.TP U1.7 U$31.P$M2
SDA: IC1.C1 IC3.B2 IC4.2 R7.2 R11.2 TP8.TP U1.8 U$31.P$L1
SWDCLK: J2.4 TP3.TP U$31.P$AA24
SWDIO: J2.2 TP2.TP U$31.P$AC24
SWO: J2.6 TP1.TP U$31.P$AD22
VBAT: C2.2 C10.2 IC1.C2 TP12.TP U1.2 U1.3
VBUS: C1.2 C4.2 C34.1 D4.5 IC1.A2 J1.A4_B9 J1.A9_B4 U$20.1 U$31.P$AD2
VREG: C11.1 C37.2 C49.1 IC1.B2 IC2.A1 IC2.A2 IC2.A3 TP9.TP
XC1: C28.1 U$22.1 U$31.P$B24
XC2: C27.1 U$22.3 U$31.P$A23

## Tracks (layer width: path | path; a pad name or v marks a point on that pad's centre or on a via)
3V1
  Top 0.127: U$31.P$AC5 27.71,20.14 28.77,20.14 29.37,20.74 C35.1
3V3  (via drill 0.2, 0.3)  (9 unrouted)
  Top 0.152: 28.86,14.54 U$31.P$B1 | R11.1 38.17,25.71 C12.1 | 39.87,24.74 v41.8,24.74 | TP7.TP 43.96,29.63 v43.02,28.69
  Top 0.2: R3.1 v19.03,30.49 | IC3.C2 C5.2 7.69,3.34 7.87,3.52 v7.87,3.54 | Q2.2 18.77,33.29 v18.82,33.24 | R14.2 30.97,5.38 v30.97,5.49 | R12.2 20.27,5.3 v20.27,5.49 | R13.2 9.07,5.19 v9.07,5.34 | C3.1 25.77,9.89 25.22,9.89 24.85,9.52 IC4.10 | C3.1 26.11,9.55 26.11,9.38 26.35,9.14 IC4.7 | C3.1 25.97,10.23 26.12,10.39 v26.47,10.39 | C22.1 23.2,12.93 23.03,12.93 22.67,12.57 v22.67,12.24 | v30.67,13.54 30.35,13.86 30.35,14.52 | C26.1 22.83,21.45 22.68,21.45 21.6,22.53 21.6,24.97 v21.77,25.14 | C33.1 24.83,21.71 22.67,23.86 v22.67,24.04 | J2.1 v38.89,9.86 v38.9,9.86
  Top 0.305: C36.1 29.32,20.04 28.55,19.27 U$31.P$Y2 | U$31.P$A22 C22.1 | C15.1 30.35,14.52 U$31.P$B1 | C33.1 25.34,21.02 U$31.P$AD14 | U$31.P$AD23 C26.1 | C36.1 29.82,19.48 29.35,19.02 U$31.P$W1 | C36.1 v29.86,20.04
  Route2 0.152: C13.1 39.28,25.15 39.28,10.24 v38.9,9.86 | v41.8,24.74 43.02,25.96 v43.02,28.69
  Route2 0.2: 38.12,25.24 23.46,25.24 19.02,29.68 19.02,30.46 19.03,30.46 v19.03,30.49 19.03,33.03 v18.82,33.24 | v7.87,3.54 7.87,4.14 v9.07,5.34 9.22,5.49 v20.27,5.49 26.87,5.49 | 26.87,5.49 v30.97,5.49 32.07,5.49 36.07,9.49 36.07,12.34 | 36.07,12.34 36.07,14.84 | 36.07,14.84 36.07,23.19 | 36.07,23.19 32.92,20.04 v29.86,20.04 | 36.07,12.34 34.12,10.39 v26.47,10.39 24.52,10.39 v22.67,12.24 | v38.77,25.54 38.77,24.54 37.97,23.74 36.62,23.74 36.07,23.19 | C12.1 38.12,25.24 | 38.12,25.24 37.42,24.54 23.17,24.54 v22.67,24.04 | 24.12,25.24 21.87,25.24 v21.77,25.14 | 36.07,14.84 34.77,13.54 v30.67,13.54 | 26.87,5.49 25.85,6.51 IC4.3 | R10.1 37.4,25.96 38.12,25.24
  other vias: 39.12,26.14 38.17,25.29 39.42,25.29 25.85,7.41 37.4,28.27
  pour Route2 (no thermals): 38.68,25.9 38.66,25.88 38.64,25.86 37.65,25.86 37.65,24.67 37.65,24.67 39.89,24.67 39.89,25.86 39.6,25.86 39.58,25.88 39.56,25.9 39.54,25.92 39.54,26.78 38.7,26.78 38.7,25.92
  pour Top (no thermals): 38.68,25.9 38.66,25.88 38.64,25.86 37.65,25.86 37.65,24.67 37.65,24.67 39.89,24.67 39.89,25.86 39.6,25.86 39.58,25.88 39.56,25.9 39.54,25.92 39.54,26.79 38.7,26.79 38.7,25.92
ALERT  (via drill 0.2 pad 0.1)
  Top 0.152: U1.5 15.25,7.27 v15.62,7.64 | v17.12,9.24 17.12,13.84 20.27,16.99 21.87,16.99 U$31.P$J24
  Top 0.2: U1.5 13.92,7.26
  Route15 0.152: v17.12,9.24 15.62,7.74 v15.62,7.64
ANT  (via drill 0.2 pad 0.1)  (1 unrouted)
  Top 0.152: C29.1 21.62,16.44 22.02,16.04 22.61,16.04 U$31.P$H23 | v20.62,18.29 20.32,18.59 v20.32,19.54 v20.31,19.55 | U$5.1 v40.12,18.19
  Route15 0.152: v20.62,18.29 21.42,18.29 22.84,16.87 v22.84,16.29 | v40.12,18.19 37.37,18.19 34.22,21.34 25.84,21.34 25.81,21.32 20.96,21.32 20.32,20.68 v20.32,19.55 v20.31,19.55
D_N
  Top 0.152: D4.6 25.63,23.91 26.3,23.24 27.22,23.24 27.7,22.76 27.7,22.14 arc90 27.93,21.91 28.43,21.91 arc-90 28.67,21.67 arc-90 28.43,21.43 27.93,21.43 arc90 27.7,21.2 27.7,20.66 U$31.P$AD4
D_P
  Top 0.152: D4.4 23.73,23.91 24.68,22.96 27.1,22.96 27.42,22.64 27.42,20.6 U$31.P$AD6
DEC1
  Top 0.152: U$31.P$C1 29.26,15.44 C30.1
DEC3
  Top 0.152: C23.1 22.59,15.02 U$31.P$D23
DEC4_6  (1 unrouted)
  Top 0.152: C20.1 27.92,13.44 27.59,13.77 U$31.P$B5 | C14.1 26.92,13.49 27.59,14.16 U$31.P$B5 | U$31.P$B5 28.77,13.34 U$4.2 | C24.1 22.12,15.74 U$31.P$E24
DN
  Top 0.152: D4.1 25.42,27.52 J1.B7 25.42,28.4 25.16,28.13 24.69,28.13 24.42,28.4 J1.A7
DP
  Top 0.152: D4.3 23.92,27.5 J1.B6 23.92,29.42 24.19,29.69 24.66,29.69 24.92,29.42 J1.A6
EPD_3V3  (via drill 0.2)
  Top 0.2: C17.1 L4.2 3.68,30.19 3.68,27.19 v3.94,26.94 | Q2.3 v15.79,31.27 | 11.21,16.2 J3.15 10.43,16.2 9.92,16.71 v9.92,16.74 9.92,16.09 10.31,15.7 J3.16 11.33,15.7 C48.2 11.21,16.2
  Route2 0.2: v15.79,31.27 11.46,26.94 v3.94,26.94 4.88,25.99 7.08,25.99 9.92,23.16 v9.92,16.74
  pour Top (no thermals): 3.35,29.85 3.37,29.81 3.37,27.64 5.57,27.64 5.57,33.34 3.37,33.34 3.37,30.97 3.35,30.93 3.33,30.91 3.29,30.89 1.62,30.89 1.62,29.89 3.29,29.89 3.33,29.87
EPD_BUSY  (via drill 0.2)
  Top 0.152: J3.9 v12.21,19.2 v12.22,19.19 | U$31.P$AD12 25.84,21.52 v25.64,21.72
  Bottom 0.152: v12.22,19.19 15.6,19.19 18.26,21.85 24.75,21.85 24.89,21.71 25.45,21.71 25.47,21.72 v25.64,21.72
EPD_CS  (via drill 0.2)
  Top 0.152: J3.12 10.8,17.74 v11.72,17.74
  Top 0.2: U$31.P$K2 v28.34,16.73
  Bottom 0.152: v11.72,17.74 13.96,17.74 14.19,17.97 17.94,17.97 21.05,14.86 27.64,14.86 28,15.22 28,16.39 v28.34,16.73
EPD_DC  (via drill 0.2)
  Top 0.152: J3.11 12.13,18.2 v13.67,19.74 | U$31.P$AD10 26.12,20.74 v26.12,22.19
  Bottom 0.152: v13.67,19.74 15.62,21.69 16.29,21.69 16.73,22.13 24.86,22.13 25,21.99 25.34,21.99 25.54,22.19 v26.12,22.19
EPD_RST  (via drill 0.2)
  Top 0.152: J3.10 v11.71,18.7 v11.72,18.69 | U$31.P$AC11 26.09,20.05 v26.12,20.08
  Bottom 0.152: v11.72,18.69 17.34,18.69 19.69,21.04 25.57,21.04 26.12,20.49 v26.12,20.08
GDR
  Top 0.305: R1.1 Q1.1 13.76,32.55 14.67,31.64 14.67,25.46 11.93,22.72 10.78,22.72 J3.2
GND  (via drill 0.2)  (145 unrouted)
  Top 0.152: J1.SH4 20.9,29.49 J1.A12_B1
  Top 0.2: IC2.C1 IC2.C2 IC2.C3 | C42.1 13.87,14.19 | C44.1 13.82,13.19 13.87,13.14
  Top 0.254: R5.1 37.97,16.38 | J2.3 J2.5 41.83,9.46 41.83,9.13 42.56,8.39 | 42.96,8.39 42.99,8.36 | U$31.P$F23 23.49,15.77 U$31.P$78 | U$31.P$B7 27.09,15.17 U$31.P$75 | C21.2 23.76,11.99 23.72,11.99
  other vias: 36.67,16.39 25.37,9.44 42.72,7.94 36.67,20.44 34.12,20.39 32.72,21.79 34.42,18.24 32.77,14.89 34.67,16.14 31.92,20.59 31.02,23.79 34.12,23.69 32.52,23.49 19.17,21.09 8.82,22.19 8.82,19.79 8.87,16.19 8.92,13.84 14.47,17.29 28.12,11.14 30.72,12.64 30.72,11.69 38.57,16.39 39.77,15.39 14.97,7.79 10.87,6.69 12.59,9.47 12.62,11.79 10.37,11.19 19.77,3.94 24.47,6.09 22.02,6.04 25.72,3.89 25.52,4.84 23.62,5.04 31.5,17.79 16.12,19.14 16.12,22.09 16.12,16.54 25.17,22.39 19.82,17.49 18.87,14.49 19.77,14.44 18.17,15.79
  pour Top (rank 2): 39.59,15.88 39.57,15.92 39.57,19.26 39.59,19.3 40.21,19.92 40.25,19.94 47.27,19.94 47.27,32.75 44.13,35.89 2.71,35.89 -0.88,32.3 -0.88,2.83 3.41,-1.46 45.93,-1.46 47.72,0.33 47.72,15.1 47.48,15.34 40.15,15.34 40.11,15.36
  pour Route15: 39.61,15.9 39.59,15.92 39.59,19.26 39.61,19.28 40.23,19.9 40.25,19.92 47.29,19.92 47.29,19.92 47.29,32.76 44.14,35.91 2.7,35.91 -0.9,32.31 -0.9,2.82 3.4,-1.48 45.94,-1.48 47.74,0.32 47.74,15.11 47.49,15.36 40.15,15.36 40.13,15.38
HAPTIC_EN  (via drill 0.2, 0.2 pad 0.1)  (1 unrouted)
  Top 0.152: U$31.P$U1 28.64,18.52 v28.37,18.79
  Route2 0.152: v21,19.66 22.97,19.66 23.53,19.66 23.54,19.68 25.24,19.68 25.25,19.66 25.93,19.66 25.94,19.68 27.64,19.68 28,19.32 28,19.16 v28.37,18.79
  Route15 0.152: v17.32,15.94 19.77,18.39 v19.77,18.44
  Bottom 0.152: v19.77,18.44 v21,19.66 21.02,19.69 | v6.69,5.35 12.73,11.39 12.79,11.39 13.02,11.62 13.02,11.64 v17.32,15.94
IMU_INT1  (via drill 0.2 pad 0.1)
  Top 0.152: IC4.5 26.69,7.94 v28.23,9.48 | v29.57,17.69 29.01,17.69 U$31.P$N1
  Bottom 0.152: v29.57,17.69 29.97,17.29 29.97,11.21 v28.24,9.48 v28.23,9.48
IMU_INT2  (via drill 0.2 pad 0.1)  (1 unrouted)
  Top 0.152: IC4.6 26.43,8.44 27.37,9.37 v27.37,9.39
  Bottom 0.152: v28.34,17.82 28.47,17.7 28.52,17.7 29.08,17.13 29.08,14.98 28.9,14.8 28.9,10.92 v27.37,9.39
LX1  (2 unrouted)
  pour Top (no thermals): 39.93,28.01 39.91,27.99 39.89,27.98 38.7,27.98 38.7,27.87 42.49,27.87 42.49,29.21 39.95,29.21 39.95,28.04
LX2  (2 unrouted)
  pour Top (no thermals): 38.7,27.16 38.7,27.08 40.14,27.08 40.16,27.06 40.18,27.04 40.2,27.02 40.2,25.77 42.49,25.77 42.49,27.16
MOSI  (via drill 0.2)
  Top 0.152: J3.14 v11.71,16.7 v11.72,16.69 | U$31.P$B13 v25.59,14.46
  Bottom 0.152: v25.59,14.46 25.59,13.51 25.17,13.09 22.02,13.09 18.17,16.94 15.95,16.94 15.7,16.69 v11.72,16.69
N$1  (via drill 0.2)  (1 unrouted)
  Top 0.152: v28.4,15.26 v28.39,15.27 U$31.P$D2
  Top 0.2: C18.2 X1.2
  Route2 0.152: v31.32,16.14 30.45,15.27 v28.41,15.27 v28.4,15.26
N$2  (via drill 0.2)
  Top 0.152: U$31.P$F2 28.36,15.79 v28.4,15.79
  Top 0.2: C19.2 X1.1
  Route2 0.152: X1.1 31.9,17.62 30.07,15.79 v28.4,15.79
  other vias: 31.9,18.64
N$3
  Top 0.152: U$4.1 U$8.2
N$5
  Top 0.152: U$31.P$B3 29.62,12.99 U$8.1
N$8
  Top 0.152: C25.1 22.32,17.54 U$31.P$N24
N$9
  Top 0.152: R5.2 IC1.D1
N$10
  Top 0.152: C31.1 42.26,17.63 ANT1.1 | C32.1 ANT1.1 | ANT1.1 41.19,17.61 U$5.2
N$11
  Top 0.152: U$31.P$A18 C21.1
N$12
  Top 0.152: IC2.D1 37.95,27.12 R6.1
N$13
  Top 0.152: IC2.E1 37.76,26.72 R7.1
N$14
  Top 0.152: C6.2 IC3.A2
N$15
  Top 0.152: R8.2 26.59,27.57 25.92,28.24 J1.A5
N$16
  Top 0.152: J1.B5 R9.1
N$18
  Top 0.305: R2.1 12.56,32.91 Q1.2
N$19
  Top 0.152: R15.1 IC4.1
N$20
  Top 0.152: C38.2 11.38,21.7 J3.4
N$21
  Top 0.152: J3.5 11.41,21.2 C39.2
N$22
  Top 0.305: R2.2 R4.1 10.84,34.05 SJ1.1
N$23
  Top 0.305: D1.2 13.03,27.14 D2.1 11.92,27.09 C16.1
N$25  (2 unrouted)
  Top 0.305: D3.2 11.77,25.24 C16.2
  pour Top (no thermals): 6.92,33.34 6.92,27.64 8.54,27.64 8.58,27.62 8.6,27.6 8.62,27.56 8.62,24.79 11.92,24.79 11.92,25.99 9.45,25.99 9.41,26.01 9.39,26.03 9.37,26.07 9.37,29.66 9.39,29.7 9.41,29.72 9.45,29.74 13.22,29.74 13.22,31.04 9.15,31.04 9.11,31.06 9.09,31.08 9.07,31.12 9.07,33.34
N$31
  Top 0.152: J3.17 C40.2
N$32
  Top 0.152: C41.2 J3.18
N$33
  Top 0.152: C42.2 J3.19
N$34
  Top 0.152: C43.2 J3.20
N$36
  Top 0.152: C45.2 J3.22
N$38
  Top 0.152: J3.24 11.42,11.7 C47.2
OUT+
  Top 0.2: IC3.A3 8.22,5.89 8.22,6.59 6.52,8.29 TP10.TP
OUT-
  Top 0.2: TP11.TP 2.12,4.14 3.87,2.39 8.17,2.39 8.65,2.86 8.65,3.87 8.15,4.36 IC3.C3
P0.13  (via drill 0.2)
  Top 0.152: 21.45,4.07 C7.2 | 21.45,4.07 SW1.2 21.56,4.25 24.05,6.73 26.68,6.73 32.16,12.22 32.16,13.4 34.18,15.41 38.7,15.41 39.42,16.13 39.42,20.24 v37.47,22.19 | R12.1 21.45,4.67 21.45,4.07 | U$31.P$AD8 26.57,20.79 v26.57,21.75
  Route15 0.152: v37.47,22.19 32.89,22.19 27.02,22.19 v26.57,21.75
P0.14  (via drill 0.2)
  Top 0.152: C8.2 10.22,4.07 10.51,4.36 | 10.51,4.36 10.53,4.38 10.1,4.82 R13.1 | 10.51,4.36 SW2.2 9.87,4.6 9.87,8.41 10.1,8.64 10.75,8.64 12.14,10.04 12.54,10.04 16.88,14.38 16.88,17.7 19.27,20.09 v19.76,20.09 | v26.64,20.1 26.59,20.05 U$31.P$AC9
  Route2 0.152: v19.76,20.09 23.57,20.09 24.17,20.69 26.1,20.69 26.62,20.17 26.62,20.13 v26.64,20.1
P1.01
  Top 0.152: 17.88,31.38 R3.2 17.88,25.2 22.48,20.6 22.48,20.37 22.84,20.02 U$31.P$Y23
  Top 0.2: 17.88,31.38 Q2.1
P1.02  (via drill 0.2)
  Top 0.152: R14.1 32.46,4.43 32.46,4.04 | 32.46,4.04 SW3.2 32.46,13.3 34.29,15.13 38.82,15.13 39.72,16.03 39.72,21.74 v38.82,22.64 | C9.2 32.43,4.07 32.46,4.04 | U$31.P$W24 22.21,19.02 21.16,20.07 21.02,20.07 20.22,20.87 v20.22,21.44
  Route15 0.152: v20.22,21.44 20.22,21.74 21.27,22.79 25.34,22.79 25.49,22.64 v38.82,22.64
PMIC_INT
  Top 0.152: IC1.A1 35.28,18.53 34.17,19.64 30.67,19.64 29.3,18.27 U$31.P$T2
PREVGH
  Top 0.152: C44.2 J3.21
  Top 0.2: J3.21 10.02,13.19 9.07,12.24 9.07,10.89 9.62,10.34 12.41,10.34 16.58,14.51 D3.1
PREVGL
  Top 0.152: C46.2 J3.23
  Top 0.2: D2.2 15.68,26.18 15.68,14.07 12.28,10.67 9.99,10.67 9.52,11.14 9.52,11.89 9.83,12.2 J3.23
RESET  (via drill 0.2)  (1 unrouted)
  Top 0.15: TP4.TP 36.62,3.84 v36.62,4.59
  Bottom 0.15: v36.62,4.59 31.77,9.44 31.77,16.95 29.23,19.49 27.83,19.49 27.64,19.68 25.95,19.68 25.59,20.04 v25.59,20.07
SCK  (via drill 0.2)
  Top 0.152: J3.13 10.85,17.29 v12.22,17.29 | v24.92,13.54 25.36,13.54 U$31.P$A12
  Bottom 0.152: v24.92,13.54 21.97,13.54 17.81,17.69 14.3,17.69 13.9,17.29 v12.22,17.29
SCL  (via drill 0.2, 0.2 pad 0.1)
  Top 0.152: TP6.TP 36.84,32.38 R10.2 R6.2 36.15,27.67 v35.97,27.49 | IC1.B1 37.2,18.03 37.17,18.03 36.42,17.28 34.82,17.28 | 34.82,17.28 28.46,17.28 28.44,17.26 U$31.P$M2 | U$31.P$M2 | IC4.12 24.71,7.94 24.32,8.33 24.32,9.42 26.02,11.12 v26.02,13.49 20.8,8.27 U1.7 | v35.22,26.49 v35.22,19.44 | 34.82,17.28 35.22,17.68 v35.22,18.09 | U$31.P$M2 v28.35,17.3
  Top 0.2: IC3.C1
  Route15 0.152: IC3.C1 6.79,4.46 7.36,4.46 8.67,5.76 18.09,5.76 21.47,9.14 23.57,9.14 29.89,15.46 29.89,16.56 29.17,17.27 28.37,17.27 v28.35,17.3
  Bottom 0.152: v35.97,27.49 35.22,26.74 v35.22,26.49 | v35.22,19.44 v35.22,18.09 | v26.02,13.49 26.74,14.21 27.92,14.21 28.8,15.1 28.8,15.96 28.75,16.02 28.75,16.94 28.39,17.3 v28.35,17.3
  other vias: 6.7,4.36
SDA  (via drill 0.2 pad 0.1)  (1 unrouted)
  Top 0.152: R7.2 R11.2 | R11.2 36.2,26.48 35.06,27.62 TP8.TP | IC1.C1 37.2,17.63 37.17,17.63 36.54,17 34.92,17 | 34.92,17 28.91,17 28.9,17.02 U$31.P$L1 29.47,16.39 v29.49,16.39 | v29.37,11.29 29.37,9.82 26.56,7.01 25.64,7.01 25.35,7.3 IC4.2 | R11.2 36.84,22.11 39.14,19.82 39.14,16.24 38.59,15.69 36.22,15.69 35.52,16.39 | 35.52,16.39 35.47,16.44 | 34.92,17 35.52,16.4 35.52,16.39 | v21.42,9.54 20.65,8.77 U1.8
  Route15 0.152: 21.42,9.49 23.47,9.49 29.37,15.39 29.37,16.27 v29.49,16.39 | 21.42,9.49 v21.42,9.54 | IC3.B2 8.38,6.04 17.92,6.04 21.37,9.49 21.42,9.49
  Bottom 0.152: v29.49,16.39 29.37,16.27 v29.37,11.29
  other vias: 7.2,4.86
SWDCLK  (via drill 0.2)
  Top 0.152: TP3.TP 41.43,5.26 43.5,7.32 43.5,9.97 43.17,10.29 41.83,10.29 41.66,10.46 40.82,10.46 J2.4 39.11,12.17 39.11,13.66 38.21,14.56 37,14.56 35.58,13.14 v35.37,13.14 | v21.02,20.64 21.02,20.62 22.12,19.52 U$31.P$AA24
  Route15 0.152: v35.37,13.14 30.73,17.78 30.73,18.58 28.24,21.06 25.95,21.06 25.93,21.04 21.43,21.04 v21.02,20.64
SWDIO  (via drill 0.2)
  Top 0.152: U$31.P$AC24 22.09,20.02 21.72,20.39 v21.72,20.49 | v33.56,11.55 33.57,11.54 38.47,11.54 J2.2 39.47,10.54 39.47,8.77 39.28,8.58 39.28,5.3 TP2.TP
  Route15 0.152: v33.56,11.55 33.34,11.55 30.17,14.72 30.17,17.66 29.57,18.26 29.57,18.73 27.8,20.51 26.18,20.51 26.16,20.48 23.87,20.48 23.51,20.12 22.1,20.12 v21.72,20.49
SWO  (via drill 0.2)
  Top 0.152: v33.97,12.84 34.02,12.84 36.02,14.84 41.83,14.84 42.28,14.39 42.28,12.42 41.42,11.55 J2.6 41.85,10.71 43.2,10.71 44.62,9.29 44.62,5.31 42.85,3.54 TP1.TP
  Route15 0.152: v33.97,12.84 30.45,16.36 30.45,18.46 28.12,20.79 26.07,20.79 26.04,20.76 23.58,20.76 U$31.P$AD22
  other vias: 23.34,20.52
VBAT  (via drill 0.2)
  Top 0.152: IC1.C2 38.3,17.73 38.59,17.43 C2.2 v38.65,17.5 | C10.2 11.17,8.27 U1.2 | C10.2 10.93,7.92 11.79,7.92 U1.3 | C10.2 10.54,7.97 v10.27,8.24 | v39.42,34.19 40.31,33.3 TP12.TP v40.32,31.49
  Route2 0.152: v10.27,8.24 8.1,10.41 8.1,24.3 7.41,24.99 1.52,24.99 0.62,25.89 0.62,29.24 5.92,34.54 39.07,34.54 v39.42,34.19 | v40.32,31.49 41.07,30.74 41.07,18.29 40.22,17.44 v40.14,17.44
  Bottom 0.152: v38.65,17.5 38.7,17.44 v40.14,17.44
VBUS  (via drill 0.2)
  Top 0.127: C34.1 28.34,20.61 U$31.P$AD2
  Top 0.152: C1.2 37.7,19.49 IC1.A2
  Top 0.305: U$20.1 21.46,27.63 22.27,28.44 J1.A9_B4 | C4.2 22.2,28.84 J1.A9_B4 | J1.A9_B4 22.27,29.38 22.94,30.05 26.41,30.05 27.08,29.38 J1.A4_B9 27.07,28.04 28.02,27.09 28.02,26.19 27.67,25.84 25.32,25.84 24.68,25.2 D4.5 24.68,23.88 24.97,23.59 v25.07,23.59 | C34.1 29.46,21.49 29.87,21.89 v29.87,23.09 | v36.92,19.69 37.12,19.49 37.7,19.49
  Route2 0.305: v25.07,23.59 29.37,23.59 v29.87,23.09
  Bottom 0.305: v36.92,19.69 36.65,19.96 35.37,19.96 32.24,23.09 v29.87,23.09
VREG  (via drill 0.2)  (6 unrouted)
  Top 0.152: C49.1 38.08,18.13 IC1.B2 | C11.1 39.22,30.74 41.35,30.74 TP9.TP
  Route2 0.2: v39.22,28.84 39.22,27.74 40.52,26.44 v40.52,19.49
  Bottom 0.2: v40.52,19.49 39.72,18.68 C49.1
  other vias: 38.22,29.74 38.47,28.84 38.64,18.68
  pour Top (no thermals): 37.65,30.31 37.65,29.22 38.09,29.22 38.11,29.2 38.13,29.18 38.15,29.16 38.15,28.26 39.49,28.26 39.49,29.41 38.8,29.41 38.78,29.43 38.76,29.45 38.74,29.47 38.74,30.31
  pour Route2 (no thermals): 37.65,30.31 37.65,29.22 38.09,29.22 38.11,29.2 38.13,29.18 38.15,29.16 38.15,28.26 39.49,28.26 39.49,29.41 38.8,29.41 38.78,29.43 38.76,29.45 38.74,29.47 38.74,30.31
XC1
  Top 0.152: C28.1 18.41,12.14 U$22.1 19.77,12.67 19.8,12.67 20.02,12.88 20.02,13.8 20.58,14.37 22.19,14.37 U$31.P$B24
XC2
  Top 0.152: C27.1 21.57,13.29 U$22.3 21.42,14.02 U$31.P$A23